# Altium PCB MB.PcbDoc
Units mil, origin at the board's own origin, x right, y up, seen from the top; angles counter-clockwise.
Board outline 3937.01 x 4763.78 mil, 2 copper layers (Top Layer, Bottom Layer); 58 components, 60 nets, 335 pads, 7 vias.
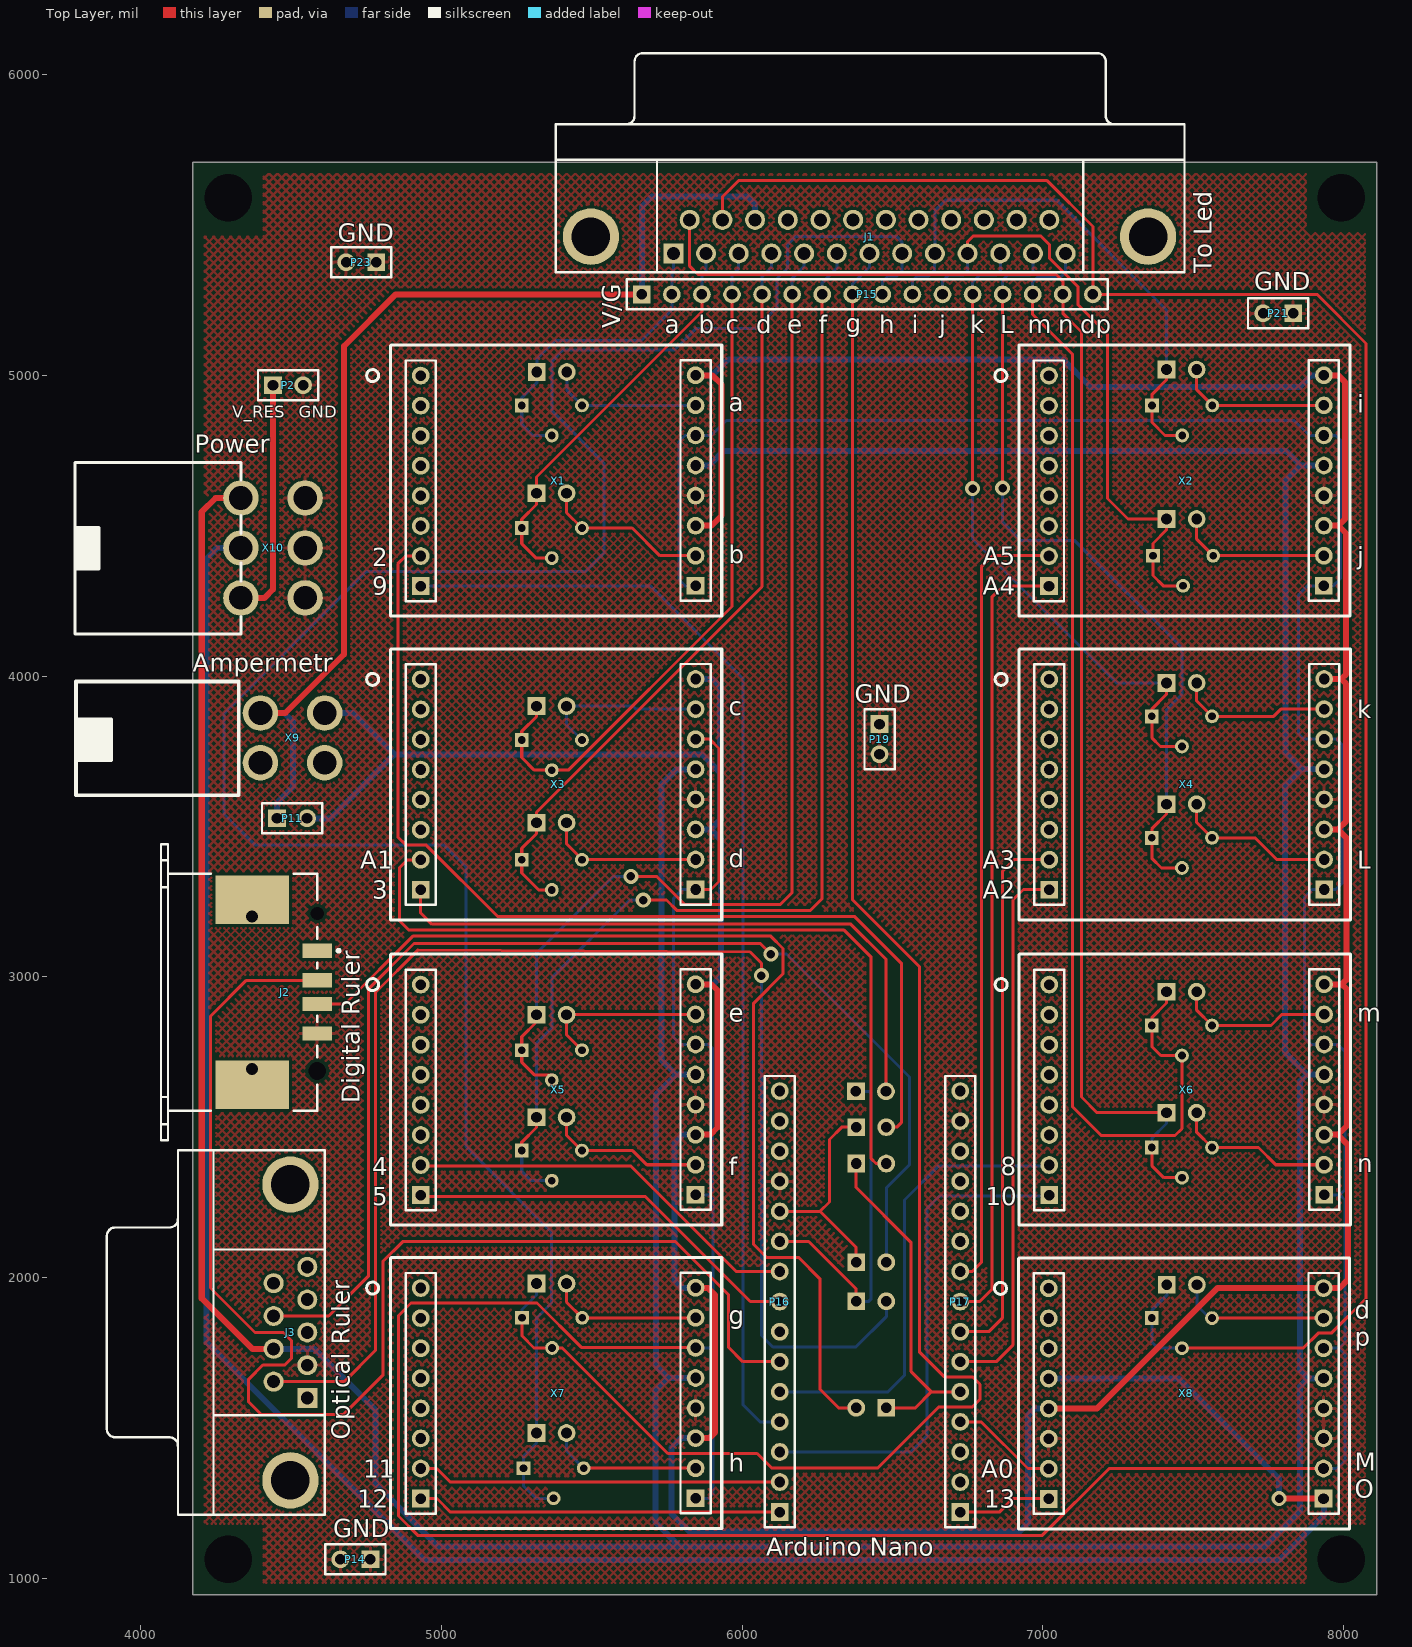
[diagram p0: Top Layer view]
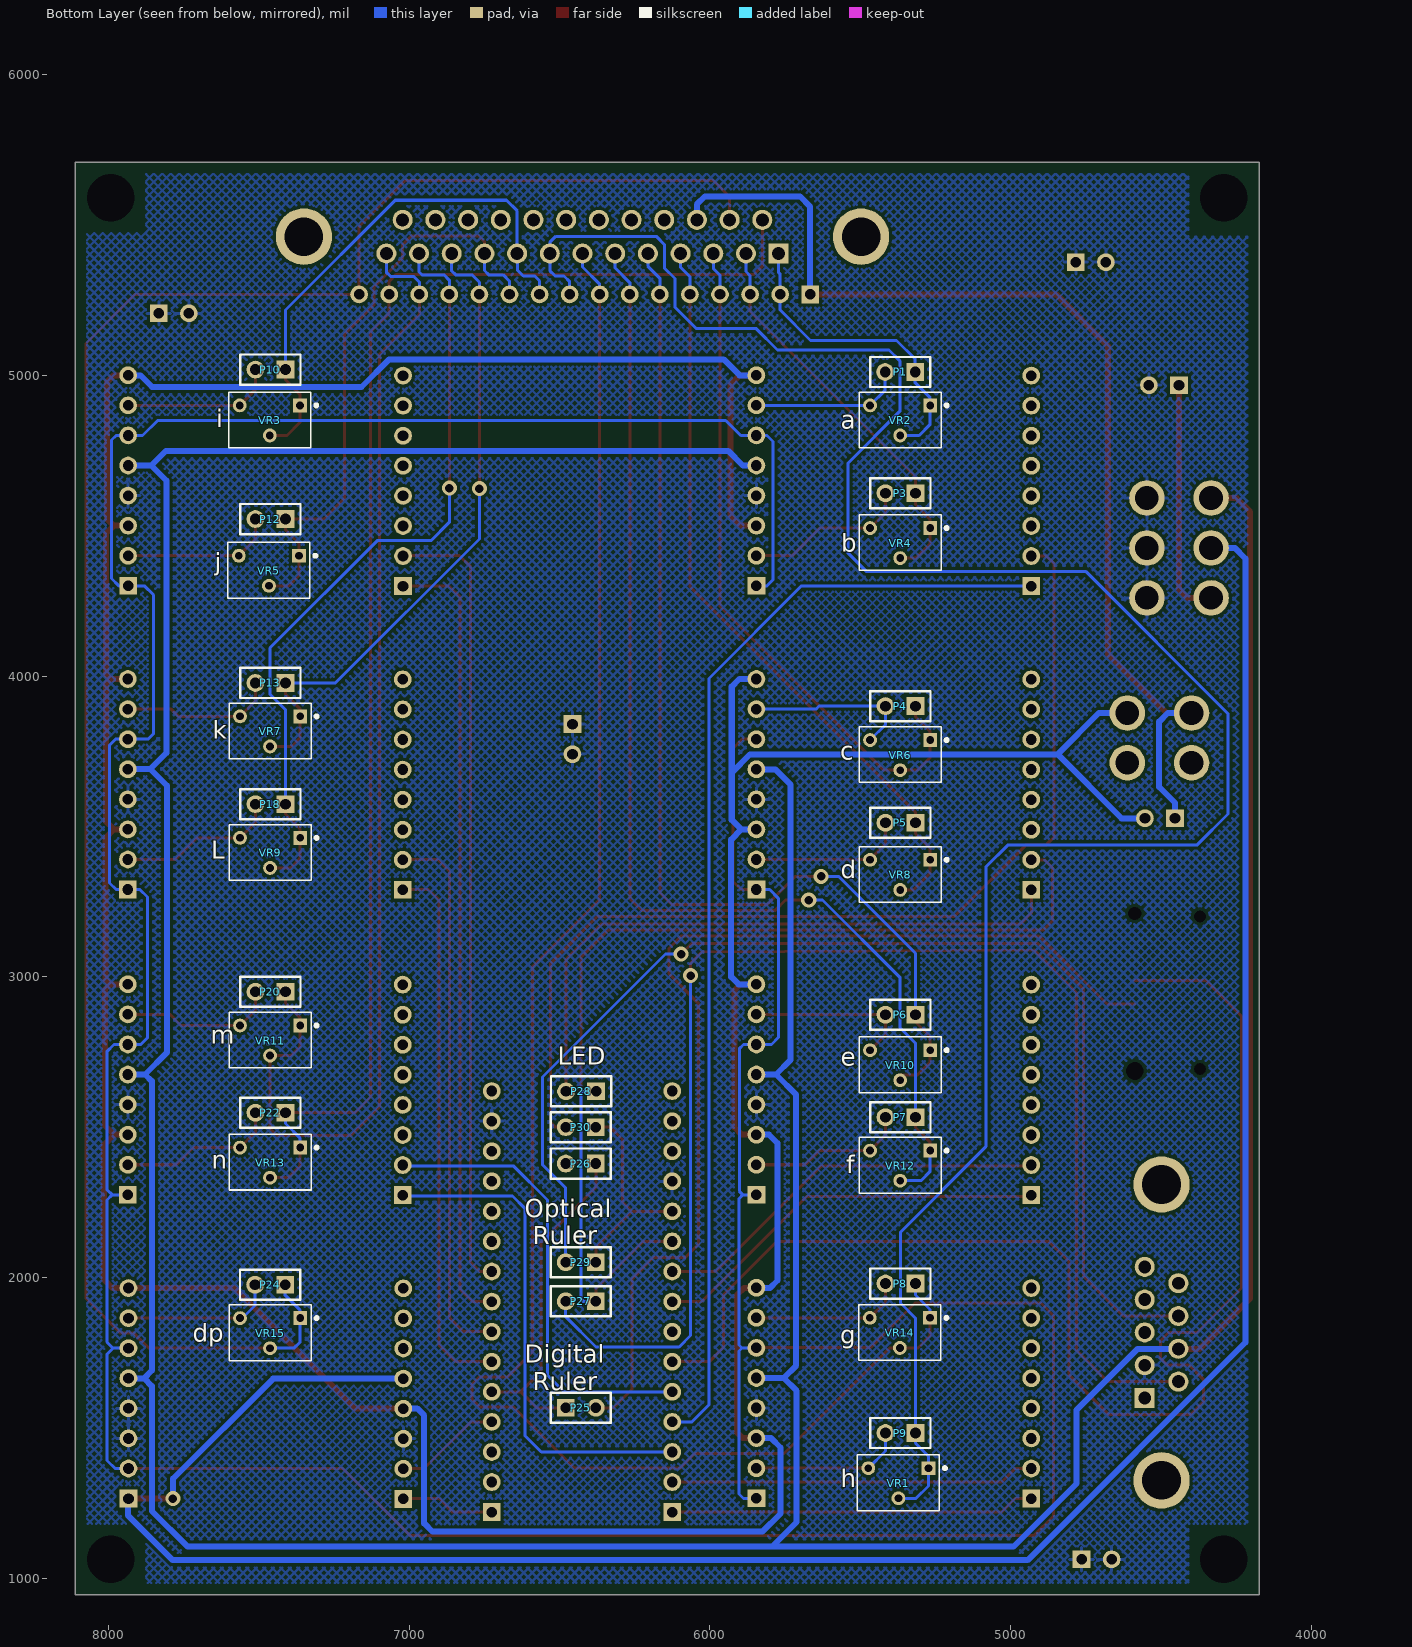
[diagram p1: Bottom Layer view, seen from below]

## Layer stack, top to bottom
Top Solder: solder mask 0.4, Solder Resist, Dk 3.5
Top Layer: signal copper 1.4
Dielectric 1: dielectric 12.6, FR-4, Dk 4.8
Bottom Layer: signal copper 1.4
Bottom Solder: solder mask 0.4, Solder Resist, Dk 3.5

## Board outline
8110.24,944.88 4173.23,944.88 4173.23,5708.66 8110.24,5708.66

## Design rules (kind name [scope] priority, off if disabled: settings)
Clearance [All] p1: gap=10 ignorepadtopadclearanceinfootprint=FALSE except(0: Arc-Hole Track-Hole SMDPad-Hole THPad-Hole Via-Hole Fill-Hole Poly-Hole Region-Hole Text-Hole)
PolygonConnect [All] p1: connectstyle=Relief reliefconductorwidth=10 reliefentries=4 polygonreliefangle="90 Angle" airgapwidth=10
RoutingVias [All] p1: holewidth=28 width=50 viastyle="Through Hole" minholewidth=28 minwidth=50 maxholewidth=28 maxwidth=50
SolderMaskExpansion [All] p1: expansion=4
Width [All] p1: maxlimit=20 minlimit=10 preferedwidth=10
30 further rules are at their usual default settings.

## Classes and differential pairs
component class MB_RELAY: J1 J2 J3 P1 P2 P3 P4 P5 P6 P7 P8 P9 P10 P11 P12 P13 P14 P15 P16 P17 P18 P19 P20 P21 P22 P23 P24 P26 P27 P29 P30 VR1 VR2 VR3 VR4 VR5 VR6 VR7 VR8 VR9 VR10 VR11 VR12 VR13 VR15 X1 X2 X3 X5 X6 X7 X8 X9 X10

## Components (designator, comment, footprint, x,y, rotation, side; value= is the part's Value field where it differs from the comment)
J1 "D Connector 25" DSUB1.385-2H25A 6423.24,5834.92 r0 top
J2 "1-353576-1" 353576 4090.94,2948.8 r180 top
J3 "D Connector 9" DSUB1.385-2H9 4123.89,1817.47 r90 top
P1 "Header 2" HDR1X2 5317,5011 r0 bottom
P2 "Header 2" HDR1X2 4440,4967 r0 top
P3 "Header 2" HDR1X2 5316,4608 r0 bottom
P4 "Header 2" HDR1X2 5316,3900 r0 bottom
P5 "Header 2" HDR1X2 5316,3512 r0 bottom
P6 "GND" HDR1X2 5316,2874.02 r0 bottom
P7 "GND" HDR1X2 5316,2533 r0 bottom
P8 "GND" HDR1X2 5316,1980 r0 bottom
P9 "GND" HDR1X2 5316,1483 r0 bottom
P10 "Header 2" HDR1X2 7411,5019 r0 bottom
P11 "Header 2" HDR1X2 4453.18,3527 r0 top
P12 "Header 2" HDR1X2 7411,4522 r0 bottom
P13 "GND" HDR1X2 7411,3977 r0 bottom
P14 "GND" HDR1X2 4763.78,1062.99 r180 top
P15 "Header 16" HDR1X16 5666.04,5269 r0 top
P16 "Header 15" HDR1X15 6125,1220 r90 top
P17 "Header 15" HDR1X15 6725,1220 r90 top
P18 "GND" HDR1X2 7411,3574 r0 bottom
P19 "GND" HDR1X2 6456.69,3840.16 r270 top
P20 "GND" HDR1X2 7411,2950 r0 bottom
P21 "GND" HDR1X2 7832,5206 r180 top
P22 "GND" HDR1X2 7411,2548 r0 bottom
P23 "GND" HDR1X2 4783,5376 r180 top
P24 "GND" HDR1X2 7412,1976 r0 bottom
P25 "Digit_rul" HDR1X2 6479,1567 r180 bottom
P26 "Relay" HDR1X2 6379,2379 r0 bottom
P27 "Optic_rul" HDR1X2 6379,1920.86 r0 bottom
P28 "Relay" HDR1X2 6378,2619 r0 bottom
P29 "Optic_ruler" HDR1X2 6379,2050.86 r0 bottom
P30 "Relay" HDR1X2 6379,2500 r0 bottom
VR1 "RES 3266W" "RES 3266W" 5273,1366 r0 bottom
VR2 "RES 3266W" "RES 3266W" 5267,4900 r0 bottom
VR3 "RES 3266W" "RES 3266W" 7363,4900 r0 bottom
VR4 "RES 3266W" "RES 3266W" 5267,4492 r0 bottom
VR5 "RES 3266W" "RES 3266W" 7366,4400 r0 bottom
VR6 "RES 3266W" "RES 3266W" 5267,3787 r0 bottom
VR7 "RES 3266W" "RES 3266W" 7362,3866 r0 bottom
VR8 "RES 3266W" "RES 3266W" 5267,3389 r0 bottom
VR9 "RES 3266W" "RES 3266W" 7362,3462 r0 bottom
VR10 "RES 3266W" "RES 3266W" 5267,2755.91 r0 bottom
VR11 "RES 3266W" "RES 3266W" 7362,2838 r0 bottom
VR12 "RES 3266W" "RES 3266W" 5267,2422 r0 bottom
VR13 "RES 3266W" "RES 3266W" 7362,2432 r0 bottom
VR14 "RES 3266W" "RES 3266W" 5268,1866 r0 bottom
VR15 "RES 3266W" "RES 3266W" 7362,1865 r0 bottom
X1 "MEZ_RELAY" MEZ_RELAY 4931,4999 r0 top
X2 "MEZ_RELAY" MEZ_RELAY 7020,4999 r0 top
X3 "MEZ_RELAY" MEZ_RELAY 4931,3989 r0 top
X4 "MEZ_RELAY" MEZ_RELAY 7021,3989 r0 top
X5 "MEZ_RELAY" MEZ_RELAY 4931,2974 r0 top
X6 "MEZ_RELAY" MEZ_RELAY 7021,2974 r0 top
X7 "MEZ_RELAY" MEZ_RELAY 4931,1965 r0 top
X8 "MEZ_RELAY" MEZ_RELAY 7019,1964 r0 top
X9 "Ampermetr" AMP_VOLTMETER 4611.69,3877 r270 top
X10 "Power" POWER 4333.18,4592 r90 top

## Footprints (in the part's own frame and the unit in brackets; to place one, negate y for a bottom-side part, rotate by r counter-clockwise, add the part's x,y. Pads: shape width x height; smd on the part's side, far side on the other; paste and mask are expansions set on the pad)
353576 [mm] "Connector; USB1.1, Type A, SM; 4 Position; Right Angle"
  rect 2.5x1.2 smd: 1(-12.6,-3.5) 2(-12.6,-1) 3(-12.6,1) 4(-12.6,3.5)
  rect 6.2x4.1 smd: 5(-7.1,7.8) 6(-7.1,-7.8)
  round 0.7 hole 1 unplated: MH1(-7.1,6.496) MH2(-7.1,-6.404)
  round 1.2 hole 1.5 unplated: MH3(-12.6,6.65)
  round 0.8 hole 1.1 unplated: MH4(-12.6,-6.65)
  silkscreen extent -14.53,-12.5 0.6,12.5
AMP_VOLTMETER [mm] "AMP_VOLTMETER"
  round 3 hole 2: 1(0,0) 2(0,-5.423) 3(4.2,-5.423) 4(4.2,0)
  silkscreen extent -2.66,-21 6.94,-7.25
DSUB1.385-2H9 [mm] "Connector; D Subminiature; 9 Position; Right Angle; Pitch 1.385 mm"
  rect 1.69x1.69 hole 1.09: 1(-5.54,-10.92)
  round 1.69 hole 1.09: 2(-2.77,-10.92) 3(0,-10.92) 4(2.77,-10.92) 5(5.54,-10.92) 6(-4.155,-8.08) 8(1.385,-8.08) 9(4.155,-8.08)
  round 1.69 hole 1.09 mask+0.102: 7(-1.385,-8.08)
  round 4.76 hole 3.26: 10(-12.495,-9.5) 11(12.495,-9.5)
  silkscreen extent -15.4,-12.4 15.4,6
DSUB1.385-2H25A [mm] "Connector; D Subminiature; 25 Position; Right Angle; Pitch 1.385 mm"
  rect 1.69x1.69 hole 1.09: 1(-16.566,-10.92)
  round 1.69 hole 1.09: 2(-13.805,-10.92) 3(-11.044,-10.92) 4(-8.283,-10.92) 5(-5.522,-10.92) 6(-2.761,-10.92) 7(0,-10.92) 8(2.761,-10.92) 9(5.522,-10.92) 10(8.283,-10.92) 11(11.044,-10.92) 12(13.805,-10.92) 13(16.566,-10.92) 14(-15.185,-8.08) 15(-12.424,-8.08) 16(-9.663,-8.08) 17(-6.902,-8.08) 18(-4.141,-8.08) 19(-1.38,-8.08) 20(1.381,-8.08) 21(4.142,-8.08) 22(6.903,-8.08) 23(9.664,-8.08) 24(12.425,-8.08) 25(15.186,-8.08)
  round 4.76 hole 3.26: 26(-23.526,-9.5) 27(23.526,-9.5)
  silkscreen extent -26.5,-12.5 26.6,6
HDR1X2 [mm] "Connector; Header; 2 Position"
  rect 1.5x1.5 hole 0.9: 1(0,0)
  round 1.5 hole 0.9: 2(2.54,0)
  silkscreen extent -1.27,-1.27 3.81,1.27
HDR1X15 [mm] "Connector; Header; 15 Position"
  rect 1.5x1.5 hole 0.9: 1(0,0)
  round 1.5 hole 0.9: 2(2.54,0) 3(5.08,0) 4(7.62,0) 5(10.16,0) 6(12.7,0) 7(15.24,0) 8(17.78,0) 9(20.32,0) 10(22.86,0) 11(25.4,0) 12(27.94,0) 13(30.48,0) 14(33.02,0) 15(35.56,0)
  silkscreen extent -1.27,-1.27 36.83,1.27
HDR1X16 [mm] "Connector; Header; 16 Position"
  rect 1.5x1.5 hole 0.9: 1(0,0)
  round 1.5 hole 0.9: 2(2.54,0) 3(5.08,0) 4(7.62,0) 5(10.16,0) 6(12.7,0) 7(15.24,0) 8(17.78,0) 9(20.32,0) 10(22.86,0) 11(25.4,0) 12(27.94,0) 13(30.48,0) 14(33.02,0) 15(35.56,0) 16(38.1,0)
  silkscreen extent -1.27,-1.27 39.37,1.27
MEZ_RELAY [mm] "мезонин реле"
  round 1.5 hole 0.9: 1(0,0) 2(0,-2.54) 3(0,-5.08) 4(0,-7.62) 5(0,-10.16) 6(0,-12.7) 7(0,-15.24) 10(23.216,-15.215) 11(23.216,-12.675) 12(23.216,-10.135) 14(23.216,-5.055) 15(23.216,-2.515) 16(23.216,0.025)
  rect 1.5x1.5 hole 0.9: 8(0,-17.78) 9(23.216,-17.755)
  round 1.5 hole 0.9 mask+0.102: 13(23.216,-7.595)
  silkscreen extent -4.57,-20.32 25.43,2.57
POWER [mm] "POWER"
  round 3 hole 2 mask+0.102: 1(0,0)
  round 3 hole 2: 2(-4.217,0) 3(-8.435,0) 4(0,-5.422) 5(-4.217,-5.422) 6(-8.435,-5.422)
  silkscreen extent -11.5,0 3,14
"RES 3266W" [mm]
  rect 1.168x1.168 hole 0.66: 1(0,0)
  round 1.168 hole 0.66: 2(2.54,2.54) 3(5.08,0)
  silkscreen extent -1.48,-1.12 5.99,3.58

## Part data
J1: "Receptacle Assembly, 25 Position, Right Angle", PackageDocument=U, DatasheetDocument=19-Mar-1999, Gender=Receptacle, LatestRevisionDate=17-Jul-2002, LatestRevisionNote="Re-released for DXP Platform.", Orientation="Right Angle", PackageReference=787202, Positions=25, Published=15-Jun-2001, Publisher="Altium Limited"
J2: "USB 1.1, Right Angle, SMT, A Type, Receptacle, 4 Position, White", PackageDocument=11-Apr-2003, ComponentLink1Description="Manufacturer Link", ComponentLink1URL=http://www.tycoelectronics.com/, ComponentLink2Description="Packaging Specification", ComponentLink2URL=http://ecommas.tycoelectronics.com/commerce/DocumentDelivery/DDEController?Action=showdoc&DocId=Customer+Drawing%7F353576%7FD%7Ftif%7FJapanese%7FJPN_CD_353576_D.tif, ContactMaterial="Copper Alloy", ContactPlating="Gold over Palladium Nickel", DatasheetDocument=11-Apr-2003, DrillSize="Corresponds to nominal value.", HousingMaterial=Thermoplastic, PackageReference=353576, PanelGround=Without, PCB_Layout="Complies with manufacturer's recommendation.", Published=15-Jul-2004, Publisher="Altium Limited"
J3: "Receptacle Assembly, 9 Position, Right Angle", PackageDocument=O, DatasheetDocument=1-Sep-1999, Gender=Receptacle, LatestRevisionDate=17-Jul-2002, LatestRevisionNote="Re-released for DXP Platform.", Orientation="Right Angle", PackageReference=788750, Positions=9, Published=15-Jun-2001, Publisher="Altium Limited"
P1 P2 P3 P4 P5 P10 P11 P12: "Header, 2-Pin", LatestRevisionDate=17-Jul-2002, LatestRevisionNote="Re-released for DXP Platform.", Publisher="Altium Limited"
P6 P7 P8 P9 P13 P14 P18 P19 P20 P21 P22 P23 P24 P25 P26 P27 P28 P29 P30: library part "Header 2", "Header, 2-Pin", LatestRevisionDate=17-Jul-2002, LatestRevisionNote="Re-released for DXP Platform.", Publisher="Altium Limited"
P15: "Header, 16-Pin", LatestRevisionDate=17-Jul-2002, LatestRevisionNote="Re-released for DXP Platform.", Publisher="Altium Limited"
P16 P17: "Header, 15-Pin", LatestRevisionDate=17-Jul-2002, LatestRevisionNote="Re-released for DXP Platform.", Publisher="Altium Limited"
X9: library part AMP_VOLTMETR
X10: library part POWER

## Free pads (board coordinates)
  round 0 hole 157.48: 2(4291.34,1062.99) 2(4291.34,5590.55) 2(7992.13,1062.99) 2(7992.13,5590.55)

## Via types
v1: diameter 50, hole 28, Top Layer to Bottom Layer, 7 vias

## Nets (pads, with @x,y where several pads share a name; then routed paths per layer and width w, separated by ;. In a path a pad name is that pad's centre, name@x,y a point inside that pad or via, vN(x,y) a via of type N, cw(c..) or ccw(c..) an arc to the next point about the centre after c; other vN are vias at no path point)
a: P1.2 VR2.3 X1.15 | length 509.7
  Bottom Layer w10: P1.2 5417,4950 VR2.3 X1.15
A0: P17.4 X8.7 | length 359.2
  Top Layer w10: P17.4 6795,1520 6950,1365 X8.7@7020,1365
A1: P17.5 P25.1 P26.1 | length 1130.5
  Top Layer w10: P26.1 6379,2299 6562,2116 6562,1687 6629,1620 ; P25.1 6576,1567 6629,1620 ; P17.5 6629,1620
A1_relay: P26.2 X3.7 | length 2603.3
  Top Layer w10: X3.7 4887,3389 4860,3362 4860,3187 4892,3155 6339,3155 6429,3065 6429,2395 6445,2379 P26.2
A1_ruler: J2.3 P25.2 | length 3464.9
  Top Layer w10: J2.3 4679.14,2909.43 4904.72,3135 6095,3135 6136,3094 6136,3010 6038,2912 6038,2110 6081,2067 6187,2067 6258,1996 6258,1629 6320,1567 P25.2
A2: P17.6 X4.8 | length 1812.3
  Top Layer w10: P17.6 6845,1720 6900,1775 6900,3255 6935,3290 X4.8@7020,3290
A3: P17.7 X4.7 | length 1815.2
  Top Layer w10: P17.7 6820,1820 6865,1865 6865,3350 6905,3390 X4.7@7020,3390
A4: P17.8 X2.8 | length 2628.9
  Top Layer w10: P17.8 6790,1920 6830,1960 6830,4262 6867,4299 X2.8
A5: P17.9 X2.7 | length 2634.8
  Top Layer w10: P17.9 6765,2020 6795,2050 6795,4363 6832,4400 X2.7@7019,4400
a_0: J1.1 P1.1 P15.2 VR2.1 VR2.2 | length 1059.6
  Bottom Layer w10: VR2.2 5304,4800 5267,4837 VR2.1 5267,4925 5317,4975 P1.1 5317,5054 5379,5116 5665,5116 5766.04,5217.04 P15.2 5766.04,5336.04 5771.04,5341.04 J1.1
b: P3.2 VR4.3 X1.10 | length 553.2
  Top Layer w10: P3.2 5416,4543 VR4.3 5634,4492 5726,4400 X1.10
b_0: J1.2 P3.1 P15.3 VR4.1 VR4.2 | length 1338.7
  Top Layer w10: VR4.2 5315,4392 5267,4440 VR4.1 5267,4521 5316,4570 P3.1 5316,4662 5866.04,5212.04 P15.3
  Bottom Layer w10: P15.3 5866.04,5331.04 5879.74,5344.74 J1.2
c: P4.2 VR6.3 X3.15 | length 567.3
  Bottom Layer w10: VR6.3 5416,3838 P4.2 5637,3900 5647,3890 X3.15
c_0: J1.3 P4.1 P15.4 VR6.1 VR6.2 | length 2316.3
  Top Layer w10: P4.1 5316,3865 5267,3816 VR6.1 5267,3729 5309,3687 VR6.2 5422,3687 5966.04,4231.04 P15.4
  Bottom Layer w10: P15.4 5966.04,5333.04 5988.44,5355.44 J1.3
d: P5.2 VR8.3 X3.10 | length 512.5
  Top Layer w10: P5.2 5416,3442.27 VR8.3@5468.13,3390.13 ; VR8.3@5476,3390 X3.10
D2: P16.11 P29.1 P30.1 | length 710.7
  Top Layer w10: P16.11 6259,2220 ; P29.1 6379,2100 6259,2220 ; P30.1 6331,2500 6290,2459 6290,2251 6259,2220
D2_relay: P30.2 X1.7 | length 3429
  Top Layer w10: X1.7 4881,4399 4855,4373 4855,3465 4881,3439 4948,3439 5186,3201 6373,3201 6529,3045 6529,2515 6514,2500 P30.2
D2_ruler: J3.8 P29.2 | length 4018.6
  Top Layer w10: J3.8 4625,1872 4757,2004 4757,2959 4909,3111 6060,3111 v1(6095.5,3075.5)
  Bottom Layer w10: v1(6095.5,3075.5) 6147.5,3075.5 6556,2667 6556,2375 6479,2298 P29.2
D3: P16.10 P27.1 P28.1 | length 1151.1
  Top Layer w10: P16.10 6221,2120 6379,1962 P27.1
  Bottom Layer w10: P28.1 6422.47,2619 6429,2612.47 6429,1929 6420.86,1920.86 P27.1
D3_relay: P28.2 X3.8 | length 2127
  Top Layer w10: X3.8 4931,3212 4968,3175 6128.86,3175 6361.35,3175 6478,3058.35 P28.2
D3_ruler: J3.6 P27.2 | length 4691.1
  Top Layer w10: J3.6 4676.89,1653.89 4781,1758 4781,2948 4922.55,3089.55 6026.67,3082.78 6064.25,3044.74 v1(6064,3004)
  Bottom Layer w10: v1(6064,3004) 6064,1807 6102,1769 6378,1769 6479,1870 P27.2
D4: P16.9 X5.7 | length 1339.5
  Top Layer w10: X5.7@4931,2371.33 5628.67,2371.33 5980,2020 P16.9
D5: P16.8 X5.8 | length 1337.6
  Top Layer w10: X5.8@4932.33,2270 5677,2270 6027,1920 P16.8
D7: J2.2 P16.6 | length 4466
  Top Layer w10: J2.2 4351.17,2988.17 4232,2869 4232,1965 4380,1817 4475,1817 4501,1791 4501,1731 4479,1709 4406,1709 4359,1662 4359,1586 4400,1545 4675,1545 4805,1675 4805,2053 4871,2119 5778,2119 5955,1942 5955,1767 6002,1720 P16.6
D8: P16.5 X6.7 | length 1547.7
  Bottom Layer w10: P16.5 6485,1620 6540,1675 6540,2258 6653.33,2371.33 X6.7@7020,2371.33
D9: P16.4 X1.8 | length 3759.8
  Bottom Layer w10: X1.8 5696,4299 6003,3992 6003,1577 6060,1520 P16.4
D10: P16.3 X6.8 | length 1689.9
  Bottom Layer w10: P16.3 6560,1420 6615,1475 6615,2230 6656.33,2271.33 X6.8@7020,2271.33
D11: P16.2 X7.7 | length 1212.6
  Top Layer w10: X7.7 4984,1365 5029,1320 P16.2
D12: P16.1 X7.8 | length 1212.6
  Top Layer w10: X7.8 4985,1265 5030,1220 P16.1
D13: P17.1 X8.8 | length 313.6
  Top Layer w10: P17.1 6855,1220 6900,1265 X8.8@7020,1265
d_0: J1.4 P5.1 P15.5 VR8.1 VR8.2 | length 2531.2
  Top Layer w10: VR8.2@5367,3299 5357,3289 5323,3289 5267,3345 VR8.1 5267,3427 5316,3476 P5.1 5316,3547 6066.04,4297.04 P15.5
  Bottom Layer w10: P15.5 6066.04,5328.04 6097.14,5359.14 J1.4
dp: P24.2 VR15.3 X8.15 | length 514
  Top Layer w10: VR15.3@7562,1857 7570,1865 X8.15
  Bottom Layer w10: P24.2 7512,1907 VR15.3@7562,1857
dp_0: J1.15 P15.16 P24.1 VR15.1 VR15.2 | length 6770.7
  Top Layer w10: J1.15 5934.09,5593.09 5988,5647 7014,5647 7166.04,5494.96 P15.16 7911,5269 8074,5106 8074,1930 7959,1815 7915,1815 7865,1765 VR15.2
  Bottom Layer w10: P24.1 7412,1941 7362,1891 VR15.1 7362,1786 7383,1765 VR15.2
e: P6.2 VR10.3 X5.15 | length 569.2
  Top Layer w10: VR10.3 5416,2806.91 P6.2 5416,2875 X5.15
e_0: J1.5 P6.1 P15.6 VR10.1 VR10.2 | length 3651.9
  Top Layer w10: P6.1@5316,2885 P6.1 5316,2850 5267,2801 VR10.1 5267,2716 5309,2674 VR10.2@5367,2674 ; v1(5630,3334) 5715,3334 5808,3241 6127,3241 6166.04,3280.04 P15.6
  Bottom Layer w10: P6.1@5316,2885 5316,3078 5572,3334 v1(5630,3334) ; P15.6 6166.04,5323.04 6205.84,5362.84 J1.5
f: P7.2 VR12.3 X5.10 | length 529.6
  Top Layer w10: P7.2 5416,2473 VR12.3 5636,2422 5683,2375 X5.10
f_0: J1.6 P7.1 P15.7 VR12.1 VR12.2 | length 3999.5
  Top Layer w10: VR12.1 5267,2450 5316,2499 P7.1 ; v1(5671,3255) 5748,3255 5782,3221 6227,3221 6266.04,3260.04 P15.7
  Bottom Layer w10: VR12.1 5267,2353 5298,2322 VR12.2 ; P7.1 5316,2779 5367,2830 5367,2997 5625,3255 v1(5671,3255) ; P15.7 6266.04,5308.04 6314.54,5356.54 J1.6
g: P8.2 VR14.3 X7.15 | length 512.5
  Top Layer w10: P8.2 5416,1918 VR14.3 X7.15
g_0: J1.7 P8.1 P15.8 VR14.1 VR14.2 | length 6057.9
  Top Layer w10: VR14.1 5268,1806 5308,1766 VR14.2 5401.89,1766 5752.89,1415 6050,1415 6098,1367 6451,1367 6654,1570 6766,1570 6791,1595 6791,1645 6766,1670 6672,1670 6589,1753 6589,3034 6366.04,3256.96 P15.8
  Bottom Layer w10: VR14.1 5268,1894 5316,1942 P8.1 ; P15.8 6366.04,5303.04 6423.24,5360.24 J1.7
GND: J2.4 J3.2 P2.2 P14.1 P14.2 P16.12 P17.14 P19.1 P19.2 P21.1 P21.2 P23.1 P23.2 X1.12 X2.12 X3.12 X4.12 X5.12 X6.12 X7.12 X8.6 X8.11 X8.12 X10.4 X10.5 X10.6
h: P9.2 VR1.3 X7.10 | length 512.6
  Top Layer w10: VR1.3 X7.10
  Bottom Layer w10: P9.2 5416,1423 VR1.3
h_0: J1.8 P9.1 P15.9 VR1.1 VR1.2 | length 7401.4
  Bottom Layer w10: VR1.2@5373,1265 5315,1265 5273,1307 VR1.1 5273,1406 5316,1449 P9.1 5316,1865 5366,1915 5366,2151 5082,2435 5082,3365 5008,3439 4379,3439 4277,3541 4277,3875 4750,4348 5480,4348 5540,4408 5540,4708 5368,4880 5368,5048 5404,5084 5775,5084 5847,5156 6046,5156 6116,5226 6116,5322 6151,5357 6151,5435 6178,5462 6512,5462 6531.94,5442.06 J1.8 6531.94,5347.94 6514,5330 6485,5330 6466.04,5311.04 P15.9
i: P10.2 VR3.3 X2.15 | length 504.5
  Top Layer w10: P10.2 7511,4952 VR3.3 ; VR3.3@7570,4900 X2.15
i_0: J1.9 P10.1 P15.10 VR3.1 VR3.2 | length 1781
  Top Layer w10: P10.1 7411,4985 7363,4937 VR3.1 7363,4843 7406,4800 7454,4800 VR3.2@7462,4808
  Bottom Layer w10: P15.10 6566.04,5314.04 6582,5330 6620,5330 6640,5350 6640,5404.35 J1.9 6640.65,5546.65 6676,5582 7046,5582 7411,5217 P10.1
j: P12.2 VR5.3 X2.10 | length 512.8
  Top Layer w10: P12.2 7511,4455 VR5.3 X2.10
j_0: J1.10 P12.1 P15.11 VR5.1 VR5.2 | length 1999.2
  Top Layer w10: J1.10 6749.35,5444.35 6768,5463 6993,5463 7021,5435 7021,5390 7116,5295 7116,5235 7215,5136 7215,4590 7283,4522 P12.1 7411,4486 7366,4441 VR5.1 7366,4334 7400,4300 VR5.2
  Bottom Layer w10: P15.11 6666.04,5313.04 6687,5334 6735,5334 6749.35,5348.35 J1.10
k: P13.2 VR7.3 X4.15 | length 515.1
  Top Layer w10: P13.2 7511,3917 VR7.3 7767,3866 7791,3890 X4.15
k_0: J1.11 P13.1 P15.12 VR7.1 VR7.2 | length 2176.4
  Top Layer w10: v1(6766.04,4623) P15.12 ; P13.1 7411,3939 7362,3890 VR7.1 7362,3795 7391,3766 VR7.2
  Bottom Layer w10: v1(6766.04,4623) 6766.04,4455.96 7245,3977 P13.1 ; P15.12 6766.04,5309.04 6791,5334 6845,5334 6858.05,5347.05 J1.11
l: P18.2 VR9.3 X4.10 | length 535.9
  Top Layer w10: P18.2 7511,3513 VR9.3 7705,3462 7777,3390 X4.10
l_0: J1.12 P15.13 P18.1 VR9.1 VR9.2 | length 2601.9
  Top Layer w10: v1(6866.04,4625.04) P15.13 ; P18.1 7411,3541 7362,3492 VR9.1 7362,3394 7394,3362 VR9.2
  Bottom Layer w10: v1(6866.04,4625.04) 6866.04,4510.96 6927,4450 7106,4450 7462,4094 7462,3939 7411,3888 P18.1 ; P15.13 6866.04,5316.04 6884,5334 6957,5334 6966.75,5343.75 J1.12
m: P20.2 VR11.3 X6.15 | length 521.5
  Top Layer w10: P20.2 7511,2889 VR11.3 7758,2838 7795,2875 X6.15
m_0: J1.13 P15.14 P20.1 VR11.1 VR11.2 | length 3953
  Top Layer w10: P15.14 6966.04,5201.96 7099,5069 7099,2567 7193.84,2472.16 7439.16,2472.16 7462,2495 VR11.2 7392,2738 7362,2768 VR11.1 7362,2864.09 7411,2913.09 P20.1
  Bottom Layer w10: P15.14 6966.04,5310.04 6985,5329 7062,5329 7075.45,5342.45 J1.13
MASTER_OUT: X1.9 X1.14 X2.9 X2.14 X3.9 X3.14 X4.9 X4.14 X5.9 X5.14 X6.9 X6.14 X7.9 X7.14 X8.10 X8.14 | length 14723.9
  Top Layer w10: X7.14 5843,1768 5465,1768 5318,1915 4899,1915 4857,1873 4857,1207 4921,1143 6998,1143 7220,1365 X8.10 ; X3.9 5896,3290 5923,3317 5923,3759 5892,3790 X3.14
  Bottom Layer w10: X7.14 5893,1766 ; X5.9 5890,2275 ; X3.9 5801,3290 5772,3261 5772,2798 5795,2775 X5.14 5888,2775 5902,2761 5902,2287 5890,2275 ; X1.9 5810,4300 5790,4320 5790,4780 5810,4800 X1.14 5897,4800 5947,4850 7836,4850 7886,4800 X2.14 7974,4800 7989,4785 7989,4324 7965,4300 X2.9 7880,4300 7850,4270 7850,3808 7868,3790 X4.14 7976,3790 7996,3770 7996,3312 7974,3290 X4.9 7895,3290 7870,3265 7870,2797 7892,2775 X6.14 7981,2775 8005,2751 8005,2293 7987,2275 ; X7.9@5846,1265 5888,1265 5903,1280 5903,1756 5893,1766 ; X8.10 7977,1365 8004,1392 8004,1745 7984,1765 ; X8.14 7984,1765 ; X6.9 7987,2275 ; 5890,2275 5903,2262 5903,1776 5893,1766 ; 7984,1765 8004,1785 8004,2258 7987,2275
n: P22.2 VR13.3 X6.10 | length 533.7
  Top Layer w10: P22.2 7511,2483 VR13.3 7717,2432 7774,2375 X6.10
n_0: J1.14 P15.15 P22.1 VR13.1 VR13.2 | length 4771.4
  Top Layer w10: J1.14 5825.39,5362.61 5853,5335 7044,5335 7066.04,5312.96 P15.15 7066.04,5205.96 7128,5144 7128,2600 7180,2548 P22.1 ; VR13.1 7362,2372 7402,2332 VR13.2
  Bottom Layer w10: VR13.1 7362,2463 7411,2512 P22.1
V/G_FROM_A: P11.2 X1.11 X1.16 X2.11 X2.16 X3.11 X3.16 X4.11 X4.16 X5.11 X5.16 X6.11 X6.16 X7.11 X7.16 X8.5 X8.16 X9.1 | length 14208.4
  Top Layer w20: X7.11 5891,1466 5910,1485 5910,1942 5886,1966 X7.16 ; X5.11 5894,2475 5918,2499 5918,2955 5898,2975 X5.16 ; X1.11 5898,4500 5931,4533 5931,4970 5901,5000 X1.16 ; X8.5@7020,1565 7180,1565 7580,1965 X8.16 7986,1965 8014,1993 8014,2442 7981,2475 ; X2.11 7982,4500 ; X2.16 7982,5000 8005,4977 8005,4523 7982,4500 ; X6.11 7981,2475 ; X6.16 7994,2975 ; X4.11 7981,3490 ; X4.16 7992.13,3990 ; 7981,2475 8011,2505 8011,2958 7994,2975 ; 7981,3490 8008,3517 8008,3974.13 7992.13,3990 ; 7981,3490 8009,3462 8009,2990 7994,2975 ; 7982,4500 8008,4474 8008,4005.87 7992.13,3990
  Bottom Layer w20: P11.2 4631,3527 4843.53,3739.53 ; X9.1 4706.06,3877 4843.53,3739.53 ; X7.16@5844,1965 5800,1965 5775,1990 5775,2447 5803,2475 X5.11 ; X7.11 5796,1466 5765,1435 5765,1215 5825,1155 6922,1155 6950,1183 6950,1542 6973,1565 X8.5@7020,1565 ; X5.16 5904,2975 5929,3000 5929,3456 5895,3490 ; X3.11 5895,3490 ; X3.16 5902,3990 5927,3965 5927,3679 ; X1.16 5901,5000 5954,5053 7066,5053 7158,4961 7854,4961 7893,5000 X2.16 ; 4843.53,3739.53 4910.43,3739.53 4910.48,3739.47 5790.53,3739.47 5790.58,3739.53 5866.47,3739.53 5927,3679 ; 5895,3490 5927,3522 5927,3679
V/G_TO_A: J1.16 P11.1 P15.1 X9.2 | length 3652.9
  Top Layer w20: X9.2 4481,3877 4676,4072 4676,5097 4848,5269 4881,5269 P15.1
  Bottom Layer w20: X9.2 4477,3877 4506,3848 4506,3631 4453.18,3578.18 P11.1 ; P15.1 5666.04,5561.04 5700,5595 6016,5595 6042.79,5568.21 J1.16
V_LED: X8.4 X8.9 X10.2 | length 7986.8
  Top Layer w20: v1(7785,1265) X8.9
  Bottom Layer w20: X10.2 4254,4425.96 4219,4390.96 4219,1783.88 4942.88,1060 7786,1060 7934,1208 X8.9@7934,1265 ; X8.4 7452,1664 7785,1331 v1(7785,1265)
V_MB: J3.7 X1.13 X2.13 X3.13 X4.13 X5.13 X6.13 X7.13 X8.13 X10.1 | length 15806
  Top Layer w20: X10.1 4249,4592 4203,4546 4203,1931 4371.06,1762.94 J3.7
  Bottom Layer w20: J3.7 4577.06,1762.94 4780,1560 4780,1315 4990,1105 5793,1105 ; X3.13@5843.67,3690 5782,3690 5732,3640 5732,2723 5780,2675 ; X7.13 5754,1666 ; X5.13 5780,2675 ; X1.13 5890,4700 5939,4749 7808,4749 7857,4700 ; 7855,2653 7855,1691 7881,1665 ; 7856,2653 7878,2675 ; X8.13 7881,1665 ; X4.13@7934,3691 7860,3691 ; X2.13 7857,4700 ; X6.13 7878,2675 ; 5754,1666 5713,1707 5713,2608 5780,2675 ; 5754,1666 5711,1623 5711,1187 5793,1105 ; 5793,1105 7736.28,1105 7855,1223.72 7855,1639 7881,1665 ; 7857,4700 7807,4650 7807,3744 7860,3691 ; 7860,3691 7805,3636 7805,2748 7878,2675
V_RESERVE: P2.1 X10.3 | length 797.5
  Top Layer w20: X10.3 4411.91,4259.91 4440,4288 P2.1
pads on no net: J1.17 J1.18 J1.19 J1.20 J1.21 J1.22 J1.23 J1.24 J1.25 J1.26 J1.27 J2.1 J2.5 J2.6 J2.MH1 J2.MH2 J2.MH3 J2.MH4 J3.1 J3.3 J3.4 J3.5 J3.9 J3.10 J3.11 P16.7 P16.13 P16.14 P16.15 P17.2 P17.3 P17.10 P17.11 P17.12 P17.13 P17.15 X1.1 X1.2 X1.3 X1.4 X1.5 X1.6 X2.1 X2.2 X2.3 X2.4 X2.5 X2.6 X3.1 X3.2 X3.3 X3.4 X3.5 X3.6 X4.1 X4.2 X4.3 X4.4 X4.5 X4.6 X5.1 X5.2 X5.3 X5.4 X5.5 X5.6 X6.1 X6.2 X6.3 X6.4 X6.5 X6.6 X7.1 X7.2 X7.3 X7.4 X7.5 X7.6 X8.1 X8.2 X8.3 X9.3 X9.4

## Polygon pours and split planes (outlines as drawn)
GND on Bottom Layer "NONET_L02_P-001" (hatched 45Degree grid 20 track 8, remove dead copper, pour order 12): 4212.6,5669.29 8070.87,5669.29 8070.87,984.25 4212.6,984.25
no net on Bottom Layer "NONET_L02_P-001" (solid, remove dead copper, pour order 2): 4015.75,5354.33
no net on Bottom Layer "NONET_L02_P-001" (solid, remove dead copper, pour order 0): 4015.75,5393.7
GND on Top Layer "NONET_L02_P-001" (hatched 45Degree grid 20 track 8, remove dead copper, pour order 10): 4212.6,5669.29 4212.6,984.25 8070.87,984.25 8070.87,5669.29
no net on Top Layer "NONET_L02_P-001" (solid, remove dead copper, pour order 8): 4251.97,5629.92
no net on Top Layer "NONET_L02_P-001" (solid, remove dead copper, pour order 6): 4094.49,5354.33

## Other copper
Top Layer:
  pour cut-out: 8110.24,5708.66 7874.02,5708.66 7874.02,5472.44 8110.24,5472.44
  pour cut-out: 4173.23,5708.66 4409.45,5708.66 4409.45,5460.91 4173.23,5460.91
  pour cut-out: 4173.23,944.88 4173.23,1181.1 4409.45,1181.1 4409.45,944.88
  pour cut-out: 8110.24,944.88 8110.24,1181.1 7874.02,1181.1 7874.02,944.88
  pour cut-out: 4015.75,5393.7
Bottom Layer:
  pour cut-out: 4173.23,1181.1 4409.45,1181.1 4409.45,944.88 4173.23,944.88
  pour cut-out: 4173.23,5708.66 4409.45,5708.66 4409.45,5460.91 4173.23,5460.91
  pour cut-out: 7874.02,5708.66 8110.24,5708.66 8110.24,5472.44 7874.02,5472.44
  pour cut-out: 7874.02,1181.1 8110.24,1181.1 8110.24,944.88 7874.02,944.88

## Silkscreen, mask and mechanical layers (free items; w line width, h text height)
Top Overlay:
  text "To Led" at 7561.04,5339 h60 r90
  text "V/G" at 5594.04,5157 h60 r90
  text "g" at 6345.04,5143 h60
  text "a" at 5742.04,5140.01 h60
  text "b" at 5855.04,5140.01 h60
  text "c" at 5946.04,5140.01 h60
  text "d" at 6046.04,5140.01 h60
  text "e" at 6150.04,5140.01 h60
  text "f" at 6254.04,5140.01 h60
  text "h" at 6455.04,5140.01 h60
  text "i" at 6563.04,5140.01 h60
  text "j" at 6655.04,5140 h60
  text "k" at 6759.04,5140.01 h60
  text "L" at 6858.04,5140.01 h60
  text "m" at 6950.04,5140.01 h60
  text "n" at 7050.04,5140.01 h60
  text "dp" at 7124.04,5140 h60
  text "a" at 5955,4880 h60
  text "i" at 8045,4875 h60
  text "V_RES" at 4305,4859 h40
  text "GND" at 4526,4859 h40
  text "b" at 5955,4375 h60
  text "A5" at 6800,4370 h60
  text "j" at 8045,4369.99 h60
  text "2" at 4770,4365 h60
  text "9" at 4770,4270 h60
  text "A4" at 6800,4270 h60
  text "c" at 5955,3870 h60
  text "k" at 8045,3860 h60
  text "d" at 5955,3365 h60
  text "A1" at 4730,3360 h60
  text "A3" at 6800,3360 h60
  text "L" at 8045,3360 h60
  text "3" at 4770,3260 h60
  text "A2" at 6800,3260 h60
  text "e" at 5955,2850 h60
  text "m" at 8045,2850 h60
  text "Digital Ruler" at 4728,2580 h60 r90
  text "n" at 8045,2350 h60
  text "4" at 4770,2340 h60
  text "f" at 5955,2340 h60
  text "8" at 6860,2340 h60
  text "5" at 4770,2240 h60
  text "10" at 6810,2240 h60
  text "g" at 5955,1844.99 h60
  text "d / p" at 8036,1773 h60
  text "Optical Ruler" at 4695,1461 h60 r90
  text "h" at 5955,1354.99 h60
  text "11" at 4740,1335 h60
  text "A0" at 6795,1335 h60
  text "M / O" at 8036,1268 h60
  text "12" at 4720,1235 h60
  text "13" at 6805,1235 h60
  text "Arduino Nano" at 6080,1075 h60
Bottom Overlay:
  text "i" at 7641,4828 h60
  text "a" at 5565,4822 h60
  text "b" at 5563,4413 h60
  text "j" at 7646,4350 h60
  text "k" at 7653,3792 h60
  text "c" at 5567,3721 h60
  text "L" at 7658,3393 h60
  text "d" at 5565,3328 h60
  text "m" at 7659,2778 h60
  text "LED" at 6506,2708 h60
  text "e" at 5565,2705 h60
  text "n" at 7656,2362 h60
  text "f" at 5547,2346 h60
  text "Optical /  Ruler" at 6615,2111 h60
  text "dp" at 7720,1786 h60
  text "g" at 5567,1780 h60
  text "Digital /  Ruler" at 6615,1626 h60
  text "h" at 5565,1303 h60
Mechanical 1:
  the board outline again, w10